# Altium PCB Main Board - Copy.PcbDoc
Units mil, origin at the board's own origin, x right, y up, seen from the top; angles counter-clockwise.
Board outline 11820 x 5900 mil, 2 copper layers (Top Layer, Bottom Layer); 43 components, 95 nets, 354 pads, 0 vias.
Unrouted connection lines stored in the file: 206.
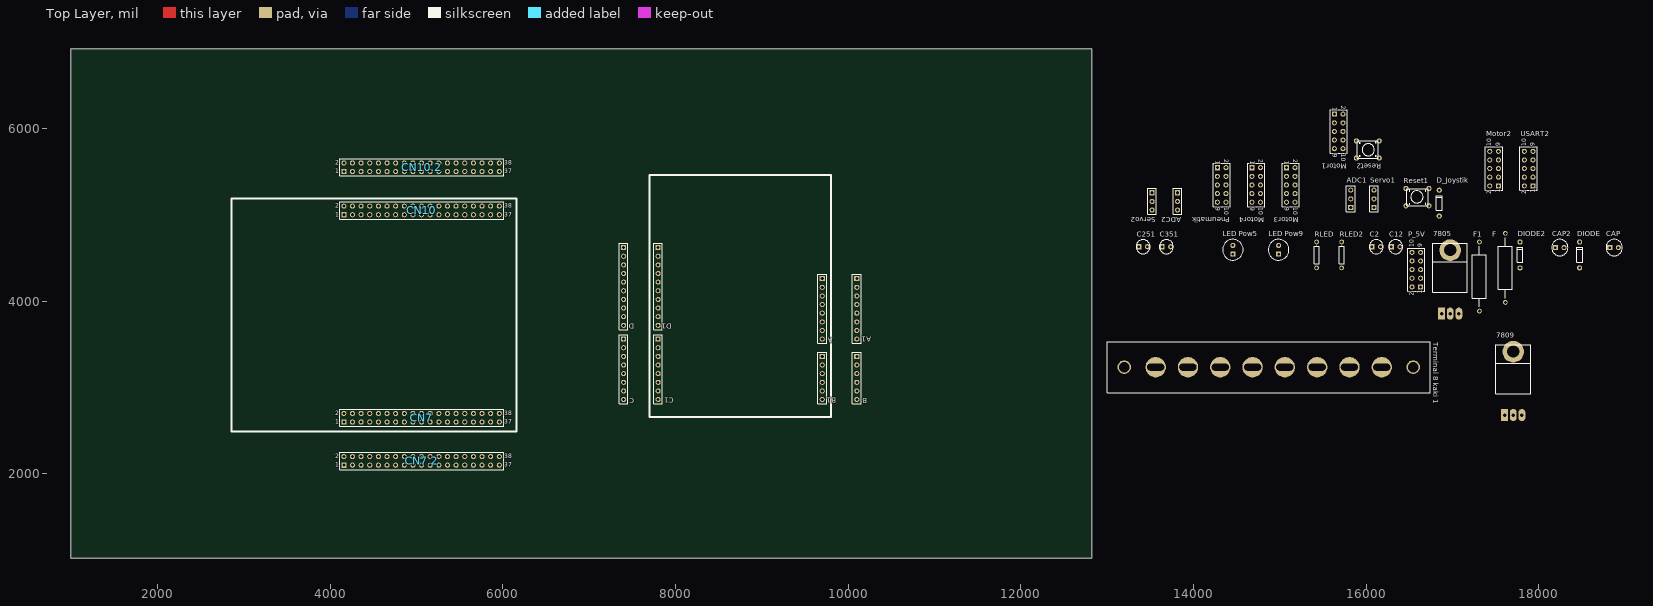
[diagram p0: Top Layer view]
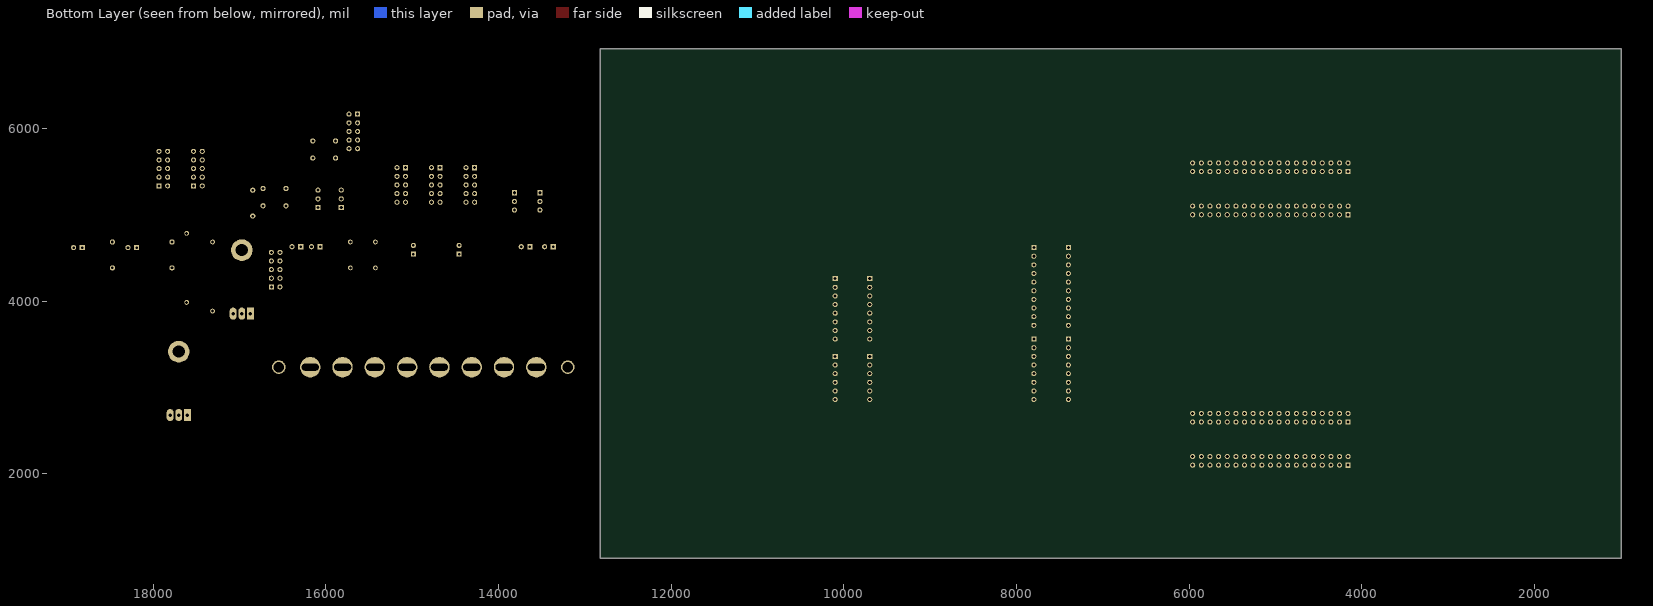
[diagram p1: Bottom Layer view, seen from below]

## Layer stack, top to bottom
Top Layer: signal copper 1.4
Dielectric: dielectric 12.6, FR-4, Dk 4.8
Bottom Layer: signal copper 1.4

## Board outline
1000,1020 1000,6920 12820,6920 12820,1020

## Design rules (kind name [scope] priority, off if disabled: settings)
Clearance [All] p1: gap=10
PolygonConnect [All] p1: connectstyle=Relief reliefconductorwidth=10 reliefentries=4 polygonreliefangle="90 Angle"
RoutingVias [All] p1: holewidth=28 width=50 viastyle="Through Hole" minholewidth=28 minwidth=50 maxholewidth=28 maxwidth=50
SilkscreenOverComponentPads [All] p1: minsilkscreentomaskgap=10
SolderMaskExpansion [All] p1: expansion=4
Width [All] p1: maxlimit=10 minlimit=10 preferedwidth=10
27 further rules are at their usual default settings.

## Components (designator, comment, footprint, x,y, rotation, side; value= is the part's Value field where it differs from the comment)
7805 "7805" 78XX/79XX 16490,4095 r90 top
7809 "7809" 78XX/79XX 17220,2920 r90 top
A "Header 8" HDR1X8 9700,4260 r270 top
A1 "Header 8" HDR1X8 10100,4260 r270 top
ADC1 "Header 3" HDR1X3 15820,5085 r90 top
ADC2 "Header 3" HDR1X3 13815,5255 r270 top
B "Header 6" HDR1X6 10100,3360 r270 top
B1 "Header 6" HDR1X6 9700,3360 r270 top
C "Header 8" HDR1X8 7400,3560 r270 top
C1 "Header 8" HDR1X8 7800,3560 r270 top
C2 "cap 1uF/50V" "cap 1uF/50V" 15765,4630 r0 top
C12 "cap 1uF/50V" "cap 1uF/50V" 15990,4630 r0 top
C251 "cap 1uF/50V" "cap 1uF/50V" 13065,4630 r0 top
C351 "cap 1uF/50V" "cap 1uF/50V" 13335,4630 r0 top
CAP "cap 10uF/16V" "cap 10uF/16V" 18920,4620 r0 top
CAP2 "cap 10uF/16V" "cap 10uF/16V" 18290,4620 r0 top
CN7 "Header 19X2" HDR2X19 4160,2600 r0 top
CN7.2 "Header 19X2" HDR2X19 4160,2100 r0 top
CN10 "Header 19X2" HDR2X19 4160,5000 r0 top
CN10.2 "Header 19X2" HDR2X19 4160,5500 r0 top
D "Header 10" HDR1X10 7400,4620 r270 top
D1 "Header 10" HDR1X10 7800,4620 r270 top
D_Joystik "Zener" "D Zener" 16945,4985 r90 top
DIODE "Zener" "D Zener" 18570,4385 r90 top
DIODE2 "Zener" "D Zener" 17880,4385 r90 top
F "Inductor Adj" AXIAL-0.8 17610,4385 r90 top
F1 "Inductor Adj" AXIAL-0.8 17310,4285 r90 top
"LED Pow5" "LED sedang" "LED sedang" 14455,4745 r90 top
"LED Pow9" "LED sedang" "LED sedang" 14985,4745 r90 top
Motor1 "Header 5X2" HDR2X5 15630,6165 r270 top
Motor2 "Header 5X2" HDR2X5 17530,5335 r90 top
Motor3 "Header 5X2" HDR2X5 15075,5545 r270 top
Motor4 "Header 5X2" HDR2X5 14675,5545 r270 top
P_5V "Header 5X2" HDR2X5 16630,4165 r90 top
Pneumatik "Header 5X2" HDR2X5 14275,5545 r270 top
Reset1 "pushbutton" pushbutton 17025,5205 r0 top
Reset2 "pushbutton" pushbutton 15585,5755 r180 top
RLED "Res1" AXIAL-0.3 15425,4535 r90 top
RLED2 "Res1" AXIAL-0.3 15715,4535 r90 top
Servo1 "Header 3" HDR1X3 16090,5085 r90 top
Servo2 "Header 3" HDR1X3 13520,5255 r270 top
"Terminal 8 kaki 1" "Terminal Blok 8 Kaki Besar" "TERMINAL 8 KAKI" 13000,2940 r0 top
USART2 "Header 5X2" HDR2X5 17930,5335 r90 top

## Footprints (in the part's own frame and the unit in brackets; to place one, negate y for a bottom-side part, rotate by r counter-clockwise, add the part's x,y. Pads: shape width x height; smd on the part's side, far side on the other; paste and mask are expansions set on the pad)
78XX/79XX [mil]
  round 250 hole 140: 0(495,-482)
  rect 140x80 hole 42: 1(-240,-382)
  oval 140x80 hole 42: 2(-240,-482) 3(-240,-582)
  silkscreen extent 10,-682 575,-282
AXIAL-0.3 [mm] "Axial Device, Thru-Hole; 2 Leads; 0.3 in Pin Spacing"
  round 1.4 hole 0.85: 1(-3.81,0) 2(3.81,0)
  silkscreen extent -2.77,-0.76 2.77,0.76
AXIAL-0.8 [mm] "Axial Device, Thru-Hole; 2 Leads; 0.8 in Pin Spacing"
  round 1.4 hole 0.85: 1(-10.16,0) 2(10.16,0)
  silkscreen extent -8.89,-2.03 8.89,2.03
"cap 1uF/50V" [mil]
  rect 60x60 hole 30: 1(300,0)
  round 60 hole 30: 2(400,0)
  silkscreen extent 269,-81 432,81
"cap 10uF/16V" [mil]
  rect 60x60 hole 30: 1(-100,0)
  round 60 hole 30: 2(0,0)
  silkscreen extent -144,-95 46,95
"D Zener" [mil]
  round 60 hole 30: 1(0,100) 2(300,100)
  silkscreen extent 66,66 238,132
HDR1X3 [mm] "Connector; Header; 3 Position"
  rect 1.5x1.5 hole 0.9: 1(0,0)
  round 1.5 hole 0.9: 2(2.54,0) 3(5.08,0)
  silkscreen extent -1.27,-1.27 6.35,1.27
HDR1X6 [mm] "Connector; Header; 6 Position"
  rect 1.5x1.5 hole 0.9: 1(0,0)
  round 1.5 hole 0.9: 2(2.54,0) 3(5.08,0) 4(7.62,0) 5(10.16,0) 6(12.7,0)
  silkscreen extent -1.27,-1.27 13.97,1.27
HDR1X8 [mm] "Connector; Header; 8 Position"
  rect 1.5x1.5 hole 0.9: 1(0,0)
  round 1.5 hole 0.9: 2(2.54,0) 3(5.08,0) 4(7.62,0) 5(10.16,0) 6(12.7,0) 7(15.24,0) 8(17.78,0)
  silkscreen extent -1.27,-1.27 19.05,1.27
HDR1X10 [mm] "Connector; Header; 10 Position"
  rect 1.5x1.5 hole 0.9: 1(0,0)
  round 1.5 hole 0.9: 2(2.54,0) 3(5.08,0) 4(7.62,0) 5(10.16,0) 6(12.7,0) 7(15.24,0) 8(17.78,0) 9(20.32,0) 10(22.86,0)
  silkscreen extent -1.27,-1.27 24.13,1.27
HDR2X5 [mm] "Connector; Header; 5x2 Position"
  rect 1.5x1.5 hole 0.9: 1(0,0)
  round 1.5 hole 0.9: 2(0,2.54) 3(2.54,0) 4(2.54,2.54) 5(5.08,0) 6(5.08,2.54) 7(7.62,0) 8(7.62,2.54) 9(10.16,0) 10(10.16,2.54)
  silkscreen extent -1.27,-1.27 11.43,3.81
HDR2X19 [mm] "Connector; Header; 19x2 Position"
  rect 1.5x1.5 hole 0.9: 1(0,0)
  round 1.5 hole 0.9: 2(0,2.54) 3(2.54,0) 4(2.54,2.54) 5(5.08,0) 6(5.08,2.54) 7(7.62,0) 8(7.62,2.54) 9(10.16,0) 10(10.16,2.54) 11(12.7,0) 12(12.7,2.54) 13(15.24,0) 14(15.24,2.54) 15(17.78,0) 16(17.78,2.54) 17(20.32,0) 18(20.32,2.54) 19(22.86,0) 20(22.86,2.54) 21(25.4,0) 22(25.4,2.54) 23(27.94,0) 24(27.94,2.54) 25(30.48,0) 26(30.48,2.54) 27(33.02,0) 28(33.02,2.54) 29(35.56,0) 30(35.56,2.54) 31(38.1,0) 32(38.1,2.54) 33(40.64,0) 34(40.64,2.54) 35(43.18,0) 36(43.18,2.54) 37(45.72,0) 38(45.72,2.54)
  silkscreen extent -1.27,-1.27 46.99,3.81
"LED sedang" [mil]
  rect 60x60 hole 30: 1(-200,0)
  round 60 hole 30: 2(-100,0)
  silkscreen extent -270,-120 -30,120
pushbutton [mil]
  round 60 hole 35: 1(-565,-101) 1(-300,-101) 2(-565,99) 2(-300,99)
  silkscreen extent -555,-101 -310,99
"TERMINAL 8 KAKI" [mm] "Terminal Blok Hitam 8 Kaki"
  round 6 hole 2 slot 5 at 0 deg: 1(14.25,7.5) 2(23.75,7.5) 3(33.25,7.5) 4(42.75,7.5) 5(52.25,7.5) 6(61.75,7.5) 7(71.25,7.5) 8(80.75,7.5)
  round 4 hole 3: " "(5,7.5) " "(90,7.5)
  silkscreen extent 0,0 95,15

## Part data
7805 7809: library part 7805/7809/7812/7905/7909/7912
A A1 C C1: "Header, 8-Pin"
ADC1 ADC2 Servo1 Servo2: "Header, 3-Pin"
B B1: "Header, 6-Pin"
CN7 CN7.2 CN10 CN10.2: "Header, 19-Pin, Dual row"
D D1: "Header, 10-Pin"
D_Joystik DIODE DIODE2: library part "D Zener"
F F1: "Adjustable Inductor"
Motor1 Motor2 Motor3 Motor4 P_5V Pneumatik USART2: "Header, 5-Pin, Dual row"
RLED RLED2: "Resistor"
"Terminal 8 kaki 1": library part "Terminal Block 8 kaki"

## Nets (pads, with @x,y where several pads share a name; then routed paths per layer and width w, separated by ;. In a path a pad name is that pad's centre, name@x,y a point inside that pad or via, vN(x,y) a via of type N, cw(c..) or ccw(c..) an arc to the next point about the centre after c; other vN are vias at no path point)
3.3V: A1.4 A.4 CN7.2.5 CN7.5
3V3: CN7.2.16 CN7.16
5V: CN7.2.18 CN7.18
"A4 - SDA": D1.2 D.2
"A5 SCL": D1.1 D.1
AGND: CN10.2.32 CN10.32
ANALOG0: B1.1 B.1
ANALOG1: B1.2 B.2
ANALOG2: B1.3 B.3
ANALOG3: B1.4 B.4
"ANALOG4 - SDA": B1.5 B.5
"ANALOG5 - SCL": B1.6 B.6
AREF: D1.3 D.3
AVDD: CN10.2.7 CN10.7
BOOT0: CN7.2.7 CN7.7
E5V: CN7.2.6 CN7.6
FUSE1: "Terminal 8 kaki 1.1" F.1
FUSE2: "Terminal 8 kaki 1.4" F1.1
GND: 7805.2 7809.2 "LED Pow5.2" "LED Pow9.2" "Terminal 8 kaki 1.2" "Terminal 8 kaki 1.5" A1.6 A1.7 A.6 A.7 ADC1.3 ADC2.3 C2.2 C12.2 C251.2 C351.2 CAP2.2 CAP.2 CN7.2.8 CN7.2.19 CN7.2.20 CN7.2.22 CN7.8 CN7.19 CN7.20 CN7.22 CN10.2.9 CN10.2.20 CN10.9 CN10.20 D1.4 D.4 DIODE2.1 DIODE.1 Motor1.10 Motor2.10 Motor3.10 Motor4.10 P_5V.1 P_5V.3 P_5V.5 P_5V.7 P_5V.9 Pneumatik.10 Reset1.2 Reset2.2 Servo1.3 Servo2.3 USART2.10
"IO0 - RX": C1.8 C.8
"IO1 - TX": C1.7 C.7 D_Joystik.2
"IO2 - INT0 - PWM": C1.6 C.6
"IO3 - INT1 - PWM": C1.5 C.5
IO4: C1.4 C.4
"IO5 - PWM": C1.3 C.3
"IO6 - PWM": C1.2 C.2
IO7: C1.1 C.1
IO8: D1.10 D.10
"IO9 - PWM": D1.9 D.9
"IO10 - PWM - SS": D1.8 D.8
"IO11 - PWM - MOSI": D1.7 D.7
"IO12 - PWM - MISO": D1.6 D.6
"IO13 - SCK": D1.5 D.5
IOREF: CN7.2.12 CN7.12
"NetLED Pow5_1": "LED Pow5.1" RLED.1
"NetLED Pow9_1": "LED Pow9.1" RLED2.1
PA_0: CN7.2.28 CN7.28 Motor2.6
PA_1: CN7.2.30 CN7.30 Motor3.6
PA_2: CN10.2.35 CN10.35 USART2.1
PA_3: CN10.2.37 CN10.37 USART2.2
PA_4: ADC1.1 CN7.2.32 CN7.32
PA_5: CN10.2.11 CN10.11
PA_6: CN10.2.13 CN10.13
PA_7: CN10.2.15 CN10.15
PA_8: CN10.2.23 CN10.23
PA_9: CN10.2.21 CN10.21
PA_10: CN10.2.33 CN10.33
PA_11: CN10.2.14 CN10.14
PA_12: CN10.2.12 CN10.12 D_Joystik.1
PA_13: CN7.2.13 CN7.13 Motor1.1
PA_14: CN7.2.15 CN7.15 Motor1.2
PA_15: CN7.2.17 CN7.17 Motor1.6
PB_0: ADC2.1 CN7.2.34 CN7.34
PB_1: CN10.2.24 CN10.24
PB_2: CN10.2.22 CN10.22
PB_3: CN10.2.31 CN10.31
PB_4: CN10.2.27 CN10.27
PB_5: CN10.2.29 CN10.29
PB_6: CN10.2.17 CN10.17
PB_7: CN7.2.21 CN7.21
PB_8: CN10.2.3 CN10.3 Servo2.1
PB_9: CN10.2.5 CN10.5 Servo1.1
PB_10: CN10.2.25 CN10.25
PB_12: CN10.2.16 CN10.16
PB_13: CN10.2.30 CN10.30
PB_14: CN10.2.28 CN10.28
PB_15: CN10.2.26 CN10.26
PC_0: CN7.2.38 CN7.38
PC_1: CN7.2.36 CN7.36
PC_2: CN7.2.35 CN7.35
PC_3: CN7.2.37 CN7.37
PC_4: CN10.2.34 CN10.34
PC_5: CN10.2.6 CN10.6
PC_6: CN10.2.4 CN10.4 Motor4.6
PC_7: CN10.2.19 CN10.19
PC_8: CN10.2 CN10.2.2 Motor4.2
PC_9: CN10.1 CN10.2.1 Motor4.1
PC_10: CN7.1 CN7.2.1 Pneumatik.2
PC_11: CN7.2 CN7.2.2 Pneumatik.1
PC_12: CN7.2.3 CN7.3 Pneumatik.4
PC_13: CN7.2.23 CN7.23
PC_14: CN7.2.25 CN7.25 Motor2.1
PC_15: CN7.2.27 CN7.27 Motor2.2
PD_2: CN7.2.4 CN7.4 Pneumatik.3
PH_0: CN7.2.29 CN7.29 Motor3.2
PH_1: CN7.2.31 CN7.31 Motor3.1
RESET: "Terminal 8 kaki 1.6" CN7.2.14 CN7.14 Reset1.1
RESET_ARD: "Terminal 8 kaki 1.3" A1.3 A.3 Reset2.1
U5V: CN10.2.8 CN10.8
VBAT: CN7.2.33 CN7.33
VCC: 7805.3 "Terminal 8 kaki 1.7" ADC1.2 ADC2.2 C12.1 Motor1.9 Motor2.9 Motor3.9 Motor4.9 P_5V.2 P_5V.4 P_5V.6 P_5V.8 P_5V.10 Pneumatik.9 RLED.2 Servo1.2 Servo2.2
VCC2: A1.2 A1.5 A.2 A.5
VIN: 7809.3 "Terminal 8 kaki 1.8" C351.1 CN7.2.24 CN7.24 RLED2.2
VIN2: A1.8 A.8 CAP.1 DIODE.2 F.2
VIN12: 7805.1 7809.1 C2.1 C251.1 CAP2.1 DIODE2.2 F1.2
pads on no net: 7805.0 7809.0 "Terminal 8 kaki 1. " A1.1 A.1 CN7.2.9 CN7.2.10 CN7.2.11 CN7.2.26 CN7.9 CN7.10 CN7.11 CN7.26 CN10.2.10 CN10.2.18 CN10.2.36 CN10.2.38 CN10.10 CN10.18 CN10.36 CN10.38 Motor1.3 Motor1.4 Motor1.5 Motor1.7 Motor1.8 Motor2.3 Motor2.4 Motor2.5 Motor2.7 Motor2.8 Motor3.3 Motor3.4 Motor3.5 Motor3.7 Motor3.8 Motor4.3 Motor4.4 Motor4.5 Motor4.7 Motor4.8 Pneumatik.5 Pneumatik.6 Pneumatik.7 Pneumatik.8 USART2.3 USART2.4 USART2.5 USART2.6 USART2.7 USART2.8 USART2.9

## Silkscreen, mask and mechanical layers (free items; w line width, h text height)
Top Overlay:
  lines w25: 2860,2490 2860,5190 6160,5190 6160,2490 2860,2490 ; 7700,2660 9800,2660 9800,5460 7700,5460 7700,2660
Mechanical 1:
  the board outline again, w30

## Dimensions
7400,3560 to 7400,3720 on Mechanical 1
7800,2860 to 9700,2860 on Mechanical 1
5960,2700 to 5960,5000 on Mechanical 1

## Text inside footprints (layer, text, board x,y; h text height)
CN7: Top Overlay "2" at 4060,2680 h50; Top Overlay "1" at 4060,2580 h50; Top Overlay "37" at 6020,2580 h50; Top Overlay "38" at 6020,2680 h50
CN7.2: Top Overlay "2" at 4060,2180 h50; Top Overlay "1" at 4060,2080 h50; Top Overlay "37" at 6020,2080 h50; Top Overlay "38" at 6020,2180 h50
CN10: Top Overlay "2" at 4060,5080 h50; Top Overlay "1" at 4060,4980 h50; Top Overlay "37" at 6020,4980 h50; Top Overlay "38" at 6020,5080 h50
CN10.2: Top Overlay "2" at 4060,5580 h50; Top Overlay "1" at 4060,5480 h50; Top Overlay "37" at 6020,5480 h50; Top Overlay "38" at 6020,5580 h50
Motor1: Top Overlay "10" at 15710,5705 h50 r270; Top Overlay "9" at 15610,5705 h50 r270; Top Overlay "1" at 15610,6245 h50 r270; Top Overlay "2" at 15710,6265 h50 r270
Motor2: Top Overlay "10" at 17450,5795 h50 r90; Top Overlay "9" at 17550,5795 h50 r90; Top Overlay "1" at 17550,5255 h50 r90; Top Overlay "2" at 17450,5235 h50 r90
Motor3: Top Overlay "10" at 15155,5085 h50 r270; Top Overlay "9" at 15055,5085 h50 r270; Top Overlay "1" at 15055,5625 h50 r270; Top Overlay "2" at 15155,5645 h50 r270
Motor4: Top Overlay "10" at 14755,5085 h50 r270; Top Overlay "9" at 14655,5085 h50 r270; Top Overlay "1" at 14655,5625 h50 r270; Top Overlay "2" at 14755,5645 h50 r270
P_5V: Top Overlay "10" at 16550,4625 h50 r90; Top Overlay "9" at 16650,4625 h50 r90; Top Overlay "1" at 16650,4085 h50 r90; Top Overlay "2" at 16550,4065 h50 r90
Pneumatik: Top Overlay "10" at 14355,5085 h50 r270; Top Overlay "9" at 14255,5085 h50 r270; Top Overlay "1" at 14255,5625 h50 r270; Top Overlay "2" at 14355,5645 h50 r270
USART2: Top Overlay "10" at 17850,5795 h50 r90; Top Overlay "9" at 17950,5795 h50 r90; Top Overlay "1" at 17950,5255 h50 r90; Top Overlay "2" at 17850,5235 h50 r90